# Altium PCB Heart_Rate_Monitor.PcbDoc
Units mil, origin at the board's own origin, x right, y up, seen from the top; angles counter-clockwise.
Board outline 3305 x 1205 mil, 4 copper layers (Top Layer, GND, VDD, Bottom Layer); 44 components, 32 nets, 125 pads, 32 vias.
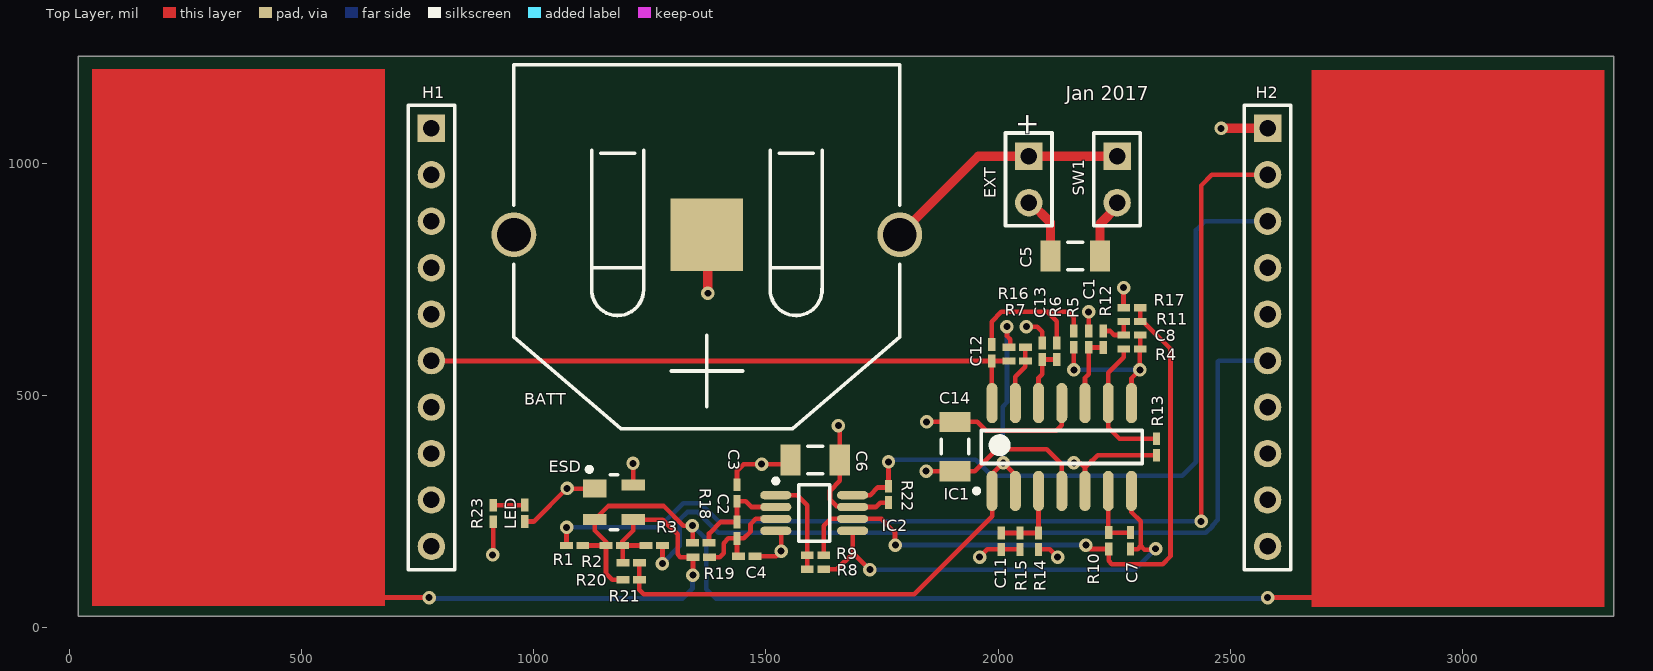
[diagram p0: Top Layer view]
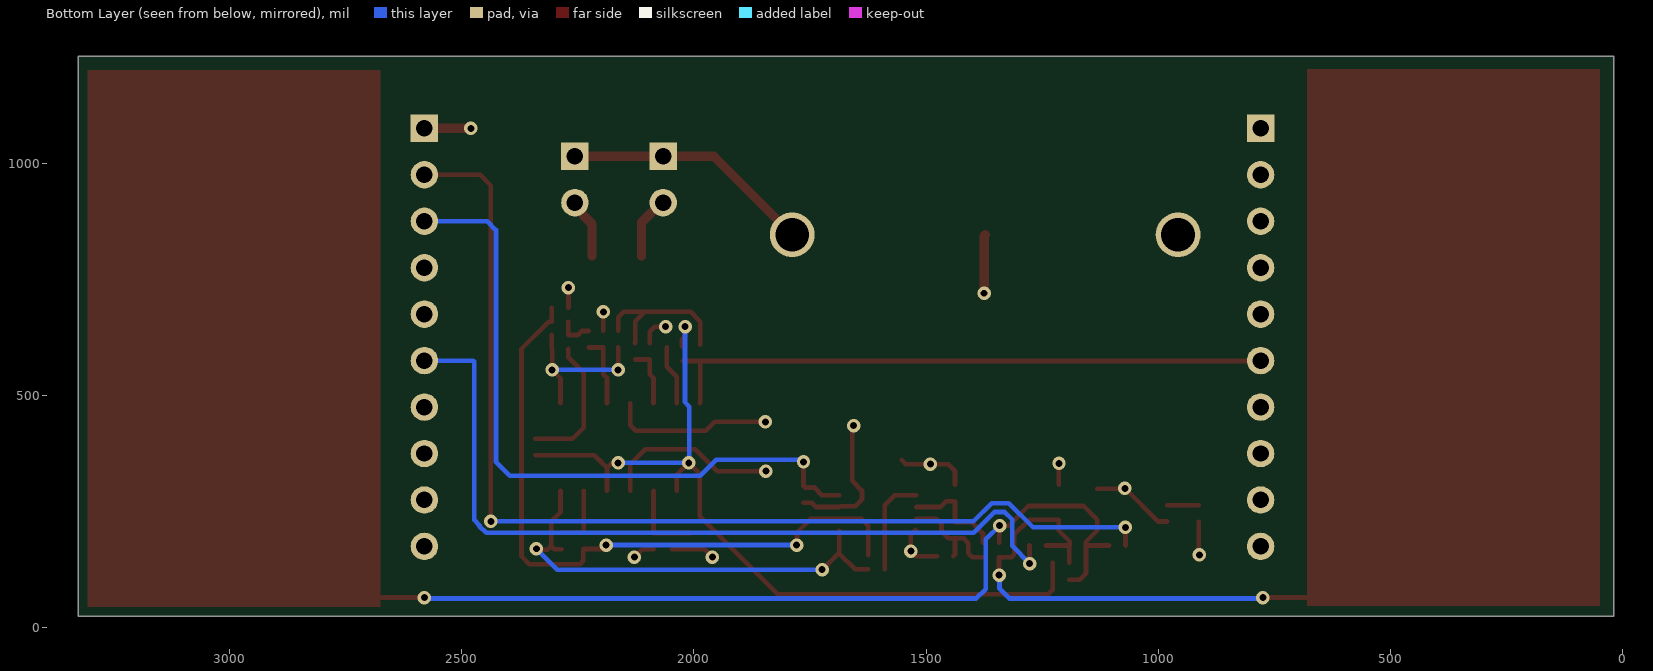
[diagram p1: Bottom Layer view, seen from below]
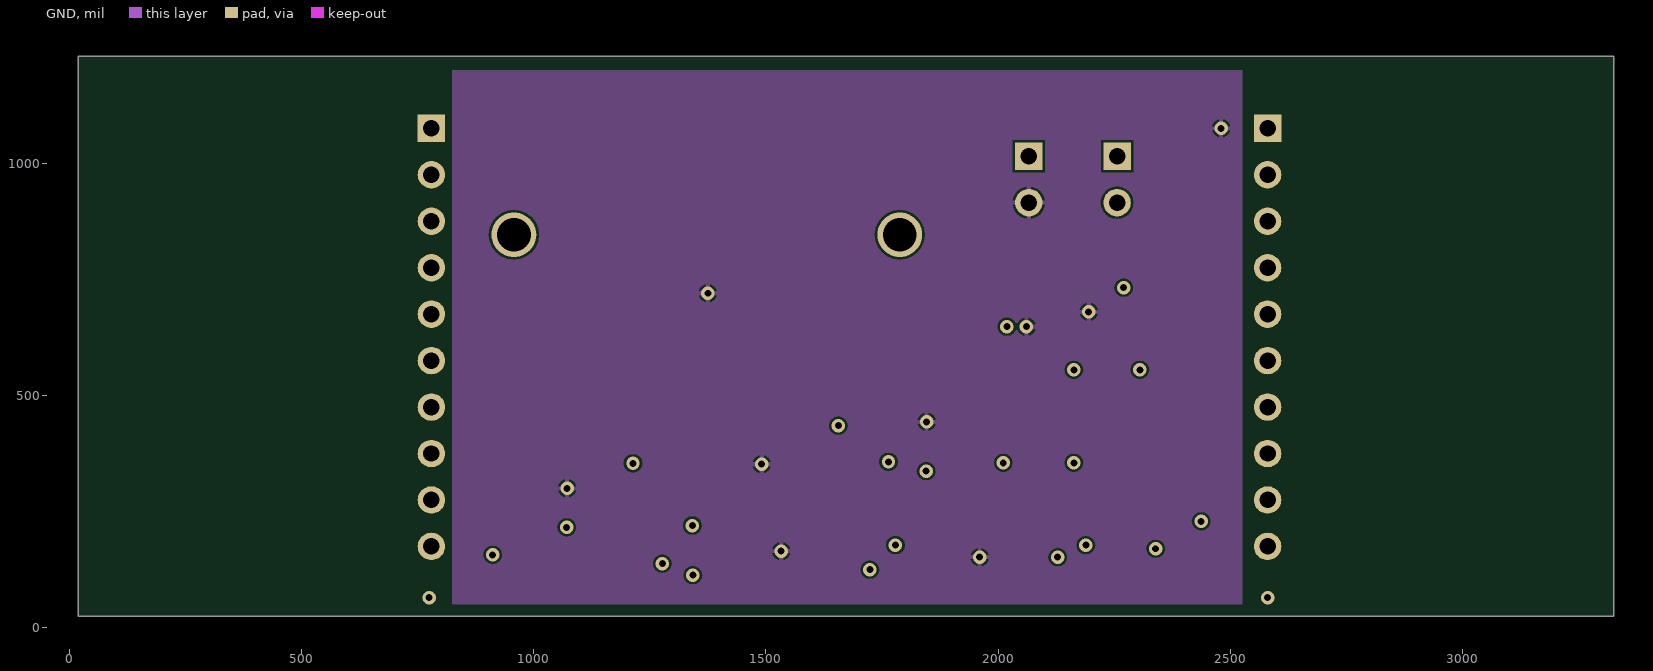
[diagram p2: GND]
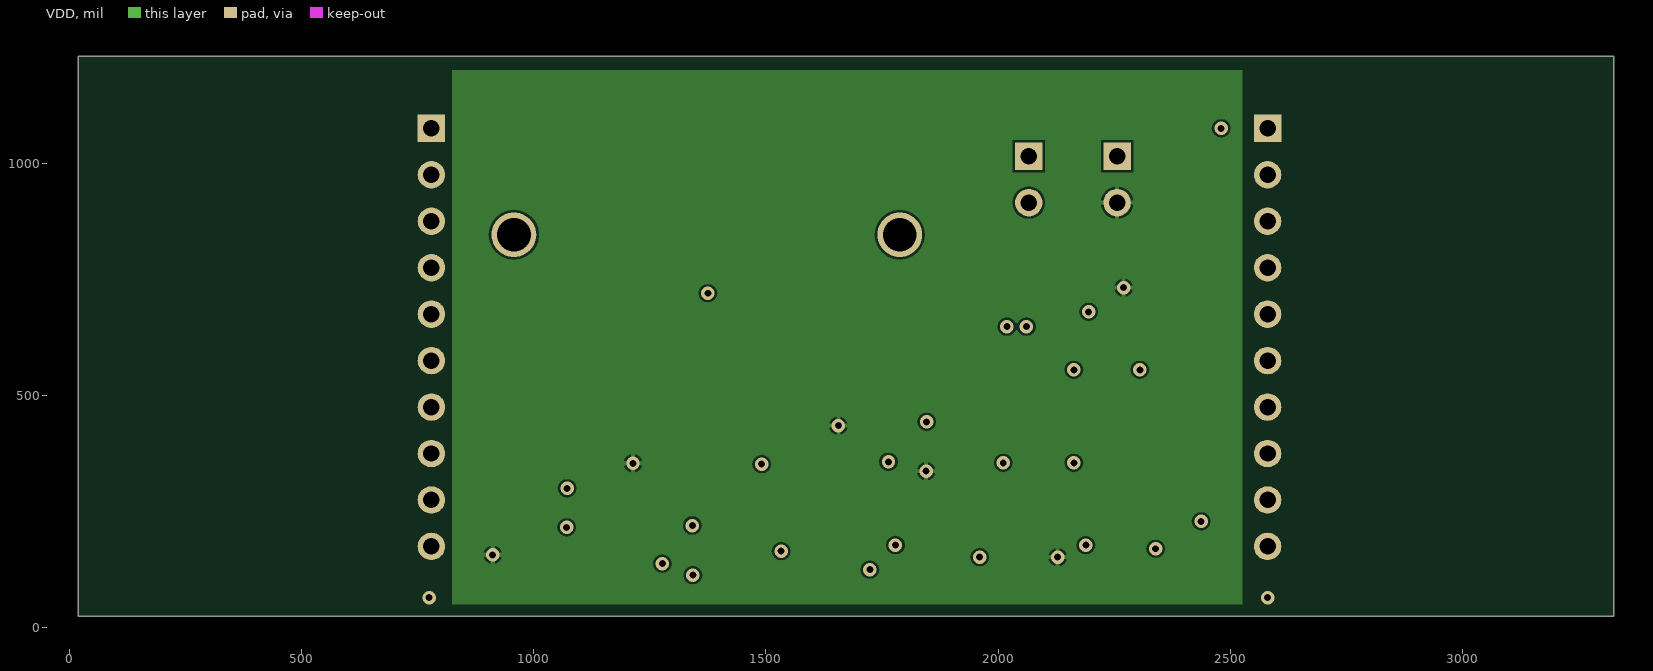
[diagram p3: VDD]

## Layer stack, top to bottom
Top Layer: signal copper 1.4
Dielectric: core 12.6, FR-4, Dk 4.8
GND: signal copper 1.4
Dielectric: prepreg 12.6, FR-4, Dk 4.8
VDD: signal copper 1.4
Dielectric: core 12.6, FR-4, Dk 4.8
Bottom Layer: signal copper 1.4

## Board outline
20,25 3325,25 3325,1230 20,1230 20,25

## Design rules (kind name [scope] priority, off if disabled: settings)
Clearance [All] p1: gap=5
FabricationTestPointUsage TestPointUsage [All] p1: valid=0 allowmultiple=FALSE
FabricationTestpoint Testpoint [All] p1: side=3 testpointundercomponent=TRUE minsize=40 maxsize=100 preferedsize=60 minholesize=0 maxholesize=40 preferedholesize=32 testpointgrid=1 allowsidetop=TRUE allowsidebottom=TRUE usegrid=TRUE gridtolerance=0.01
MinimumSolderMaskSliver [All] p1: minsoldermaskwidth=5
PolygonConnect [All] p1: connectstyle=Relief reliefconductorwidth=10 reliefentries=4 polygonreliefangle="90 Angle"
RoomDefinition Connector [InComponentClass('Connector')] p1: confinementstyle=ConfineIn formatcopy=TRUE lockcomponents=FALSE outline 30,25 3325,25 3325,1219.15 3324.03,1220 3322.09,1218.3 30,1218.3
RoomDefinition Design [InComponentClass('Design')] p2: confinementstyle=ConfineIn formatcopy=TRUE lockcomponents=FALSE outline 20,25 3325,25 3325,1230 3323.06,1228.28 20,1228.28
RoutingLayers [All] p1: top layer_v5=TRUE mid layer 1_v5=FALSE mid layer 2_v5=FALSE bottom layer_v5=TRUE
RoutingVias [All] p1: holewidth=10 width=18 viastyle="Through Hole" minholewidth=10 minwidth=18 maxholewidth=10 maxwidth=18
SilkscreenOverComponentPads [All] p1: minsilkscreentomaskgap=10
SolderMaskExpansion [All] p1: expansion=4
Width Width_GND [InNet('GND')] p1: maxlimit=20 minlimit=10 preferedwidth=10 midlayer1_maxwidth=10 midlayer2_maxwidth=10 minimp=50.000000 maximp=50.000000 favimp=50.000000
Width Width_NetBATT_1 [InNet('NetBATT_1')] p2: maxlimit=20 minlimit=10 preferedwidth=20 midlayer1_maxwidth=10 midlayer1_prefwidth=10 midlayer2_maxwidth=10 midlayer2_prefwidth=10 minimp=50.000000 maximp=50.000000 favimp=50.000000
Width Width_Vdd [InNet('VDD')] p3: maxlimit=20 minlimit=10 preferedwidth=20 midlayer1_maxwidth=10 midlayer1_prefwidth=10 midlayer2_maxwidth=10 midlayer2_prefwidth=10 minimp=50.000000 maximp=50.000000 favimp=50.000000
Width [All] p4: maxlimit=10 minlimit=10 preferedwidth=10
23 further rules are at their usual default settings.

## Classes and differential pairs
component class Design: C1 C2 C3 C4 C7 C8 C11 C12 C13 ESD IC1 IC2 R4 R5 R6 R7 R8 R9 R10 R11 R12 R13 R14 R15 R16 R17 R18 R19 R20 R21
component class Connector: BATT C5 C6 C14 EXT H1 H2 LED R1 R2 R3 R22 R23 SW1

## Components (designator, comment, footprint, x,y, rotation, side; value= is the part's Value field where it differs from the comment)
BATT "CR2032" BAT_3003 1373,846 r0 top
C1 "C0603" RESC0603N 2195,621.28 r90 top
C2 "C0603" RESC0603N 1438,210 r270 top
C3 "C0603" RESC0603N 1438,290 r270 top
C4 "C0603" RESC0603N 1459,154 r0 top
C5 "C1206" C1206 2166,800 r0 top
C6 "C1206" C1206 1606,361 r0 top
C7 "C0603" RESC0603N 2285,187 r90 top
C8 "C0603" RESC0603N 2288,630 r180 top
C11 "C0603" RESC0603N 2007,186.28 r270 top
C12 "C0603" RESC0603N 1986,592 r90 top
C13 "C0603" RESC0603N 2095,595 r90 top
C14 "C1206" C1206 1907,390 r270 top
ESD "TPD2E001" SOT143N 1173,270 r0 top
EXT "" BAT-2 2066,965 r270 top
H1 "LEFT_HEADER" HDR1X10 780,1075 r270 top
H2 "RIGHT_HEADER" HDR1X10 2580,1075 r270 top
IC1 "TLC274CD" D014_N 2137,389 r90 top
IC2 "INA332" TSOP65P490-8AN 1604,247 r0 top
LED "PWR" RESC0603N 981,246.28 r270 top
R1 "J1-0603" RESC0603N 1088.28,177 r0 top
R2 "J1-0603" RESC0603N 1173.64,177 r0 top
R3 "J1-0603" RESC0603N 1259.72,177 r0 top
R4 "J1-0603" RESC0603N 2288,600 r0 top
R5 "J1-0603" RESC0603N 2163,621.28 r90 top
R6 "J1-0603" RESC0603N 2126,595 r270 top
R7 "J1-0603" RESC0603N 2041,574 r180 top
R8 "J1-0603" RESC0603N 1606.72,126 r180 top
R9 "J1-0603" RESC0603N 1606.72,156 r180 top
R10 "J1-0603" RESC0603N 2238,187.28 r90 top
R11 "J1-0603" RESC0603N 2288,659 r0 top
R12 "J1-0603" RESC0603N 2226,621 r270 top
R13 "J1-0603" RESC0603N 2341,389 r90 top
R14 "J1-0603" RESC0603N 2087,186.28 r90 top
R15 "J1-0603" RESC0603N 2047,186.28 r270 top
R16 "J1-0603" RESC0603N 2041,604 r0 top
R17 "J1-0603" RESC0603N 2288,689 r0 top
R18 "J1-0603" RESC0603N 1360,183 r0 top
R19 "J1-0603" RESC0603N 1360.72,152 r0 top
R20 "J1-0603" RESC0603N 1210,140 r180 top
R21 "J1-0603" RESC0603N 1210,103 r0 top
R22 "J1-0603" RESC0603N 1764,287 r270 top
R23 "J1-0603" RESC0603N 913,246 r90 top
SW1 "PWR Enable" HDR1X2 2256,1015 r270 top

## Footprints (in the part's own frame and the unit in brackets; to place one, negate y for a bottom-side part, rotate by r counter-clockwise, add the part's x,y. Pads: shape width x height; smd on the part's side, far side on the other; paste and mask are expansions set on the pad)
BAT-2 [mm]
  rect 1.5x1.5 hole 0.9: 1(-1.27,0)
  round 1.5 hole 0.9: 2(1.27,0)
  silkscreen extent -2.54,-1.27 2.54,1.27
BAT_3003 [mm] "Battery Retainer for 20mm Dia. cell, Thru-Hole; Body 21.1 x 19.9 mm"
  rect 3.96x3.96 smd: 2(0,0)
  round 2.45 hole 1.85: MH1(-10.55,0) MH2(10.55,0)
  silkscreen extent -10.55,-10.6 10.55,9.3, body extent -10.55,-10.6 10.55,9.3, height 3.7
C1206 [mm] "Chip Capacitor, Body 3.2x1.6mm, IPC High Density"
  rect 1.1x1.7 smd: 1(-1.35,0) 2(1.35,0)
  silkscreen extent -0.4,-0.75 0.4,0.75, body extent -1.7,-0.9 1.7,0.9, height 1.3
D014_N [mm] "SOIC, 14-Leads, Body 8.7x3.9mm, Pitch 1.27mm, IPC Medium Density"
  oval 2.2x0.6 smd: 1(-2.4,3.81) 2(-2.4,2.54) 3(-2.4,1.27) 4(-2.4,0) 5(-2.4,-1.27) 6(-2.4,-2.54) 7(-2.4,-3.81) 8(2.4,-3.81) 9(2.4,-2.54) 10(2.4,-1.27) 11(2.4,0) 12(2.4,1.27) 13(2.4,2.54) 14(2.4,3.81)
  silkscreen extent -2.52,-4.4 0.9,4.78, body extent -2,-4.38 2,4.38, height 1.75
HDR1X2 [mm] "Connector; Header; 2 Position"
  rect 1.5x1.5 hole 0.9: 1(0,0)
  round 1.5 hole 0.9: 2(2.54,0)
  silkscreen extent -1.27,-1.27 3.81,1.27
HDR1X10 [mm] "Connector; Header; 10 Position"
  rect 1.5x1.5 hole 0.9: 1(0,0)
  round 1.5 hole 0.9: 2(2.54,0) 3(5.08,0) 4(7.62,0) 5(10.16,0) 6(12.7,0) 7(15.24,0) 8(17.78,0) 9(20.32,0) 10(22.86,0)
  silkscreen extent -1.27,-1.27 24.13,1.27
RESC0603N [mm] "Chip Resistor, Body 0.6x0.3mm, IPC Medium Density"
  rect 0.7x0.4 smd: 1(-0.45,0) 2(0.45,0)
  body extent -0.32,-0.17 0.32,0.17, height 0.3
SOT143N [mm] "SOT143, 4-Leads, Body 2.9x1.3mm, Pitch 1.9mm, Lead Span 2.5mm, IPC Medium Density"
  rect 1.3x1 smd: 1(-1.05,0.75)
  rect 1.3x0.6 smd: 2(-1.05,-0.95) 3(1.05,-0.95) 4(1.05,0.95)
  silkscreen extent -1.47,-1.5 0.2,1.92, body extent -0.7,-1.52 0.7,1.52, height 1.1
TSOP65P490-8AN [mm] "TSOP, 8-Leads, Body 3x3mm, Pitch 0.65mm, IPC Medium Density"
  oval 1.7x0.45 smd: 1(-2.1,0.975) 2(-2.1,0.325) 3(-2.1,-0.325) 4(-2.1,-0.975) 5(2.1,-0.975) 6(2.1,-0.325) 7(2.1,0.325) 8(2.1,0.975)
  silkscreen extent -2.22,-1.55 0.85,1.87, body extent -1.6,-1.6 1.6,1.6, height 1.1

## Part data
BATT: library part Battery, "Multicell Battery"
C1 C2 C3 C4 C7 C8 C11 C12 C13: library part "Cap Pol3", "Polarized Capacitor (Surface Mount)"
C5 C6 C14: library part "Cap Semi", "Capacitor (Semiconductor SIM Model)"
ESD: library part "SW DIP-2", "DIP Switch, 2 Position, SPST"
EXT SW1: library part "Header 2", "Header, 2-Pin"
H1 H2: library part "Header 10", "Header, 10-Pin"
IC1: "LinCMOS Precision Quad Operational Amplifier"
IC2: "Instrumentation Amp MSOP-8"
LED: library part LED2, "RED LED"
R1 R2 R3 R4 R5 R6 R7 R8 R9 R10 R11 R12 R13 R14 R15 R16 R17 R18 R19 R20 R21 R22 R23: library part Res3, "Resistor"

## Via types
v1: diameter 29, hole 15, Top Layer to Bottom Layer, 32 vias

## Nets (pads, with @x,y where several pads share a name; then routed paths per layer and width w, separated by ;. In a path a pad name is that pad's centre, name@x,y a point inside that pad or via, vN(x,y) a via of type N, cw(c..) or ccw(c..) an arc to the next point about the centre after c; other vN are vias at no path point)
EKG: C12.1 H1.6 IC1.14 R7.2 | length 1334.5
  Top Layer w10: H1.6 780.72,574.28 C12.1 1986,484.49 IC1.14 ; C12.1@1986.28,574 R7.2
GND: BATT.2 C1.2 C3.1 C4.2 C5.1 C6.1 C11.2 C13.2 C14.1 ESD.1 EXT.2 H2.1 IC1.11 IC2.4 LED.2 R15.2 | length 1360.6
  Top Layer w10: LED.2 1000.57,228.57 v1(1072,300) 1072.47,299.53 ESD.1 ; C3.1 1438,338 1452,352 v1(1491,352) 1543.85,352 C6.1 ; C4.2 1522,154 v1(1533,165) 1533,200.4 1523.05,210.35 IC2.4 ; v1(1846,443) 1846.15,443.15 C14.1 1954.85,443.15 1974,424 2125,424 2137,436 IC1.11 ; v1(1960,152) 1976.57,168.57 C11.2 R15.2 ; v1(2061,648) 2084,648 2095,637 C13.2 ; C1.2 v1(2195,680)
  Top Layer w20: BATT.2 1375,844 v1(1375,720) ; EXT.2 2070,915 2112.85,872.15 C5.1 ; v1(2480,1075) H2.1
HAND_LEFT: ESD.3 R2.2 R3.1 R19.1 R20.2 | length 1100.3
  Top Layer w10: 660,65 v1(775,65) ; R20.2 1192.28,176.07 R2.2 ; R3.1 R2.2 ; v1(1343,113) R19.1 1316,152 1310,158 1310,201 1278.4,232.6 ESD.3 1214.34,209.34 1191.36,186.36 R2.2
  Bottom Layer w10: v1(775,65) 777,63 1321,63 1342,84 1342,112 v1(1343,113)
HAND_RIGHT: ESD.2 R1.2 R2.1 R18.1 R21.1 | length 1972.2
  Top Layer w10: R1.2 R2.1 ; R21.1 1169,103 1156,116 1156,176.93 R2.1 ; v1(1342,220) v1@1342.28,219.72 ; R18.1 v1@1342.28,219.72 ; v1(2580,65) 2690,65 ; R2.1 1155.93,185.07 1131.66,209.34 ESD.2 1161.06,262 1280,262 1322.28,219.72 v1@1342.28,219.72
  Bottom Layer w10: v1(1342,220) 1372,190 1372,83 1392,63 2578,63 v1(2580,65)
LED_GREEN: H2.7
LED_RED: H1.2
NetBATT_1: BATT.MH2 EXT.1 SW1.1 | length 537.6
  Top Layer w20: BATT.MH2 1957.35,1015 EXT.1 SW1.1
NetC1_1: C1.1 IC1.10 R12.2 | length 154.1
  Top Layer w10: IC1.10 2187,538 2195,546 C1.1 ; C1.1@2195.28,603.28 R12.2
NetC2_1: C2.1 C3.2 IC2.2 R18.2 | length 218.6
  Top Layer w10: R18.2 1377.72,202.72 1402.72,227.72 C2.1 ; C2.1@1438,230 C3.2@1438,269.72 ; C3.2 1438.28,272 1457,272 1469.2,259.8 IC2.2
NetC2_2: C2.2 C4.1 IC2.3 R19.2 | length 238.8
  Top Layer w10: R19.2 1401,152 1409,160 1409,182 1419.28,192.28 C2.2 ; C4.1 1438,157.28 C2.2 ; IC2.3 1478.2,234.2 1467,223 1467,207 1452.28,192.28 C2.2
NetC7_2: C7.2 IC1.6 R10.2 | length 138.5
  Top Layer w10: IC1.6@2238,293.51 IC1.6 2237,206 R10.2 2238.28,204.72 C7.2
NetC8_1: C8.1 IC1.8 R4.2 R5.1 | length 344.8
  Top Layer w10: v1(2163,555) R5.1 ; IC1.8 2287,537 v1(2305,555) 2305,599.28 R4.2 C8.1
  Bottom Layer w10: v1(2163,555) v1(2305,555)
NetC8_2: C8.2 R11.1 R12.1 | length 76.9
  Top Layer w10: R12.1 2241.28,638.72 2250,630 C8.2 R11.1
NetC11_1: C11.1 IC1.3 R14.2 R15.1 | length 170.5
  Top Layer w10: C11.1 R15.1 R14.2 IC1.3
NetC12_2: C12.2 R5.2 R6.1 | length 345.5
  Top Layer w10: C12.2 1986,659 2007,680 2106,680 ; R6.1@2126.72,612 R6.1 2126,660 2106,680 ; R5.2 2163,668 2151,680 2106,680
NetC13_1: C13.1 IC1.12 R6.2 | length 128.1
  Top Layer w10: IC1.12 2087,538 2095,546 C13.1 R6.2
NetIC1_9: IC1.9 R4.1 R13.2 | length 296.8
  Top Layer w10: R4.1 2270.28,582.28 2237,549 IC1.9 2237,431 2261.28,406.72 R13.2
NetIC1_13: IC1.13 R7.1 R16.2 | length 129.5
  Top Layer w10: IC1.13 2037,540 2058.72,561.72 R7.1 R16.2
NetIC2_1: IC2.1 R8.2 R9.2 | length 214.5
  Top Layer w10: IC2.1 1567.61,285.39 1589,264 R9.2 R8.2
NetLED_1: LED.1 R23.2 | length 68.1
  Top Layer w10: R23.2 980.72,263.72 LED.1
"P1_3 (S2)": H1.5
P1_7: H2.6 R3.2 | length 1794.2
  Top Layer w10: v1(1277,138) 1277.43,138.43 R3.2
  Bottom Layer w10: v1(1277,138) 1315,176 1315,233 1331,249 1353,249 1397.5,204.5 2447.15,204.5 2461.5,218.85 2461.5,220.5 2473,232 2473,573 2475,575 H2.6
P2_6: H2.2 R1.1 | length 2318.4
  Top Layer w10: R1.1 1071,177.43 v1(1071,216) ; v1(2437,229) 2437,952 2460,975 H2.2
  Bottom Layer w10: v1(1071,216) 1270,216 1322,268 1359,268 1398,229 v1(2437,229)
REF: C7.1 IC1.7 IC2.5 R8.1 | length 998.2
  Top Layer w10: R8.1 1653,126 1686.68,159.68 ; IC2.5 1686.68,159.68 ; v1(1724,125) 1689.32,159.68 1686.68,159.68 ; C7.1 2300.28,169.28 2307,176 ; IC1.7 2287,249 2307,229 2307,176 ; v1(2339,170) 2337,168 2315,168 2307,176
  Bottom Layer w10: v1(1724,125) 2294,125 v1(2339,170)
"RESET (S1)": H2.5
SHUTDOWN: H2.3 IC2.8 R22.1 | length 1489.1
  Top Layer w10: IC2.8 1724.51,285.39 1741.13,302 1761.28,302 R22.1 v1(1764,357)
  Bottom Layer w10: v1(1764,357) 1768.5,361.5 1951.5,361.5 1986,327 2396,327 2426,357 2426,856 2445,875 H2.3
TEST: H2.4
UART_RXD: H1.4
UART_TXD: H1.3
VCM: IC1.1 IC1.2 IC1.5 R13.1 R16.1 R20.1 R21.2 | length 1829.9
  Top Layer w10: R20.1 R21.2 1227.72,81.28 1237,72 1819,72 1987,240 IC1.1 1987,331 v1(2011,355) 2037,329 IC1.2 ; v1(2019,648) 2019,628 2026,621 2026,606.72 R16.1 ; v1(2163,355) 2176,355 2187,344 ; IC1.5 2187,344 ; 2200.64,359.36 2200.64,357.64 ; R13.1 2214.28,371.28 2200.64,357.64 ; 2187,344 2200.64,357.64
  Bottom Layer w10: v1(2019,648) 2019,485 2010,476 2010,356 v1(2011,355) v1(2163,355)
VDD: C5.2 C6.2 C14.2 ESD.4 IC1.4 IC2.7 R14.1 R17.1 R22.2 R23.1 SW1.2 | length 1027.7
  Top Layer w10: v1(912,157) 913,158 R23.1 ; v1(1214,354) 1214.34,353.66 ESD.4 ; v1(1656,435) 1659.15,431.85 C6.2 1659.15,316.2 1638.21,295.27 1638.21,275.5 1652.19,261.53 1684.95,261.53 IC2.7 1736.8,259.8 1746.28,269.28 R22.2 ; v1(1845,337) 1845.15,336.85 C14.2 1949.85,336.85 1997,384 2105,384 2137,352 IC1.4 ; R14.1 2111.43,168.57 v1(2128,152) ; v1(2270,732) 2270,689.28 R17.1
  Top Layer w20: C5.2 2219.15,869.15 2256,906 SW1.2
VOUT: IC2.6 R9.1 R10.1 R11.2 R17.2 | length 1460.5
  Top Layer w10: R9.1 1624.43,219.43 1639.2,234.2 IC2.6 1748.8,234.2 1778,205 1778,179 v1(1779,178) ; v1(2189,178) 2197.43,169.57 R10.1 2238,144 2245,137 2354,137 2371,154 2371,600.51 2312.51,659 R11.2 R17.2 ; v1@2190,169 v1@2190.57,169.57
  Bottom Layer w10: v1(1779,178) v1(2189,178)
pads on no net: BATT.MH1 H1.1 H1.7 H1.8 H1.9 H1.10 H2.8 H2.9 H2.10

## Polygon pours and split planes (outlines as drawn)
GND on GND "Top Layer-No Net" (solid, pour order 2): 825,1200 825,50 2525,50 2525,1200
VDD on VDD "Top Layer-No Net" (solid, pour order 4): 825,1200 825,50 2525,50 2525,1200

## Other copper
Top Layer:
  region net HAND_RIGHT: 2675,1200 3305,1200 3305,45 2675,45
  region net HAND_LEFT: 50,1202.5 680,1202.5 680,47.5 50,47.5

## Silkscreen, mask and mechanical layers (free items; w line width, h text height)
Top Overlay:
  text "Jan 2017" at 2145,1135 h30
Top Solder:
  region: 2675,1200 3305,1200 3305,45 2675,45
  region: 50,1202.5 680,1202.5 680,47.5 50,47.5
Mechanical 1:
  lines w10: 15,25 ccw(c20,25) 20,20 ; 15,25 ccw(c20,25) 20,20 ; 15,25 ccw(c20,25) 20,20 ; 15,25 15,1230 ; 15,1230 cw(c20,1230) 20,1235 ; 15,1230 cw(c20,1230) 20,1235 ; 20,20 3325,20 ; 20,1235 3325,1235 ; 3325,20 ccw(c3325,25) 3330,25 ; 3325,20 ccw(c3325,25) 3330,25 ; 3325,1235 cw(c3325,1230) 3330,1230 ; 3325,1235 cw(c3325,1230) 3330,1230 ; 3330,25 3330,1230
Mechanical 16:
  drawing of 1874 lines, arcs and shapes, not listed
  text "1" at -1667,3492 h70
  text "2" at 1193,3492 h70
  text "3" at 4073,3492 h70
  text "4" at 6943,3492 h70
  text "A" at -3019,2586 h70
  text "A" at 8281,2586 h70
  text "B" at -3019,694 h70
  text "B" at 8281,694 h70
  text "C" at -3019,-1216 h70
  text "C" at 8281,-1216 h70
  text "ENGINEER:" at 3756,-2673 h45
  text "TITLE:" at 5256,-2673 h45
  text "PCB DESIGNER:" at 3756,-2968 h45
  text "D" at -3019,-3106 h70
  text "D" at 8281,-3106 h70
  text "DATE:" at 3756,-3273 h45
  text "PART NO.:" at 5256,-3273 h45
  text "REV:" at 7356,-3273 h45
  text "Altium Limited" at 2456,-3373 h70
  text ".PRINT_DATE" at 3806,-3393 h70
  text "12a Rodborough Rd" at 2456,-3473 h70
  text "Frenchs Forest" at 2456,-3573 h70
  text "FILE NAME:" at 3756,-3573 h45
  text "DWG NO:" at 5256,-3573 h45
  text "SCALE:" at 7356,-3573 h45
  text "NSW 2086" at 2456,-3673 h70
  text ".PCB_FILE_NAME_NO_PATH" at 3806,-3693 h70
  text "1" at -1667,-3908 h70
  text "2" at 1193,-3908 h70
  text "3" at 4073,-3908 h70
  text "4" at 6943,-3908 h70

## Text inside footprints (layer, text, board x,y; h text height)
EXT: Top Overlay "+" at 2043.28,1109.49 h45.28 r270